# Altium PCB JBCBJ.pcbdoc
Units mil, origin at the board's own origin, x right, y up, seen from the top; angles counter-clockwise.
Board outline 4587.42 x 4393.21 mil, 2 copper layers (Top Layer, Bottom Layer); 95 components, 70 nets, 402 pads, 71 vias.
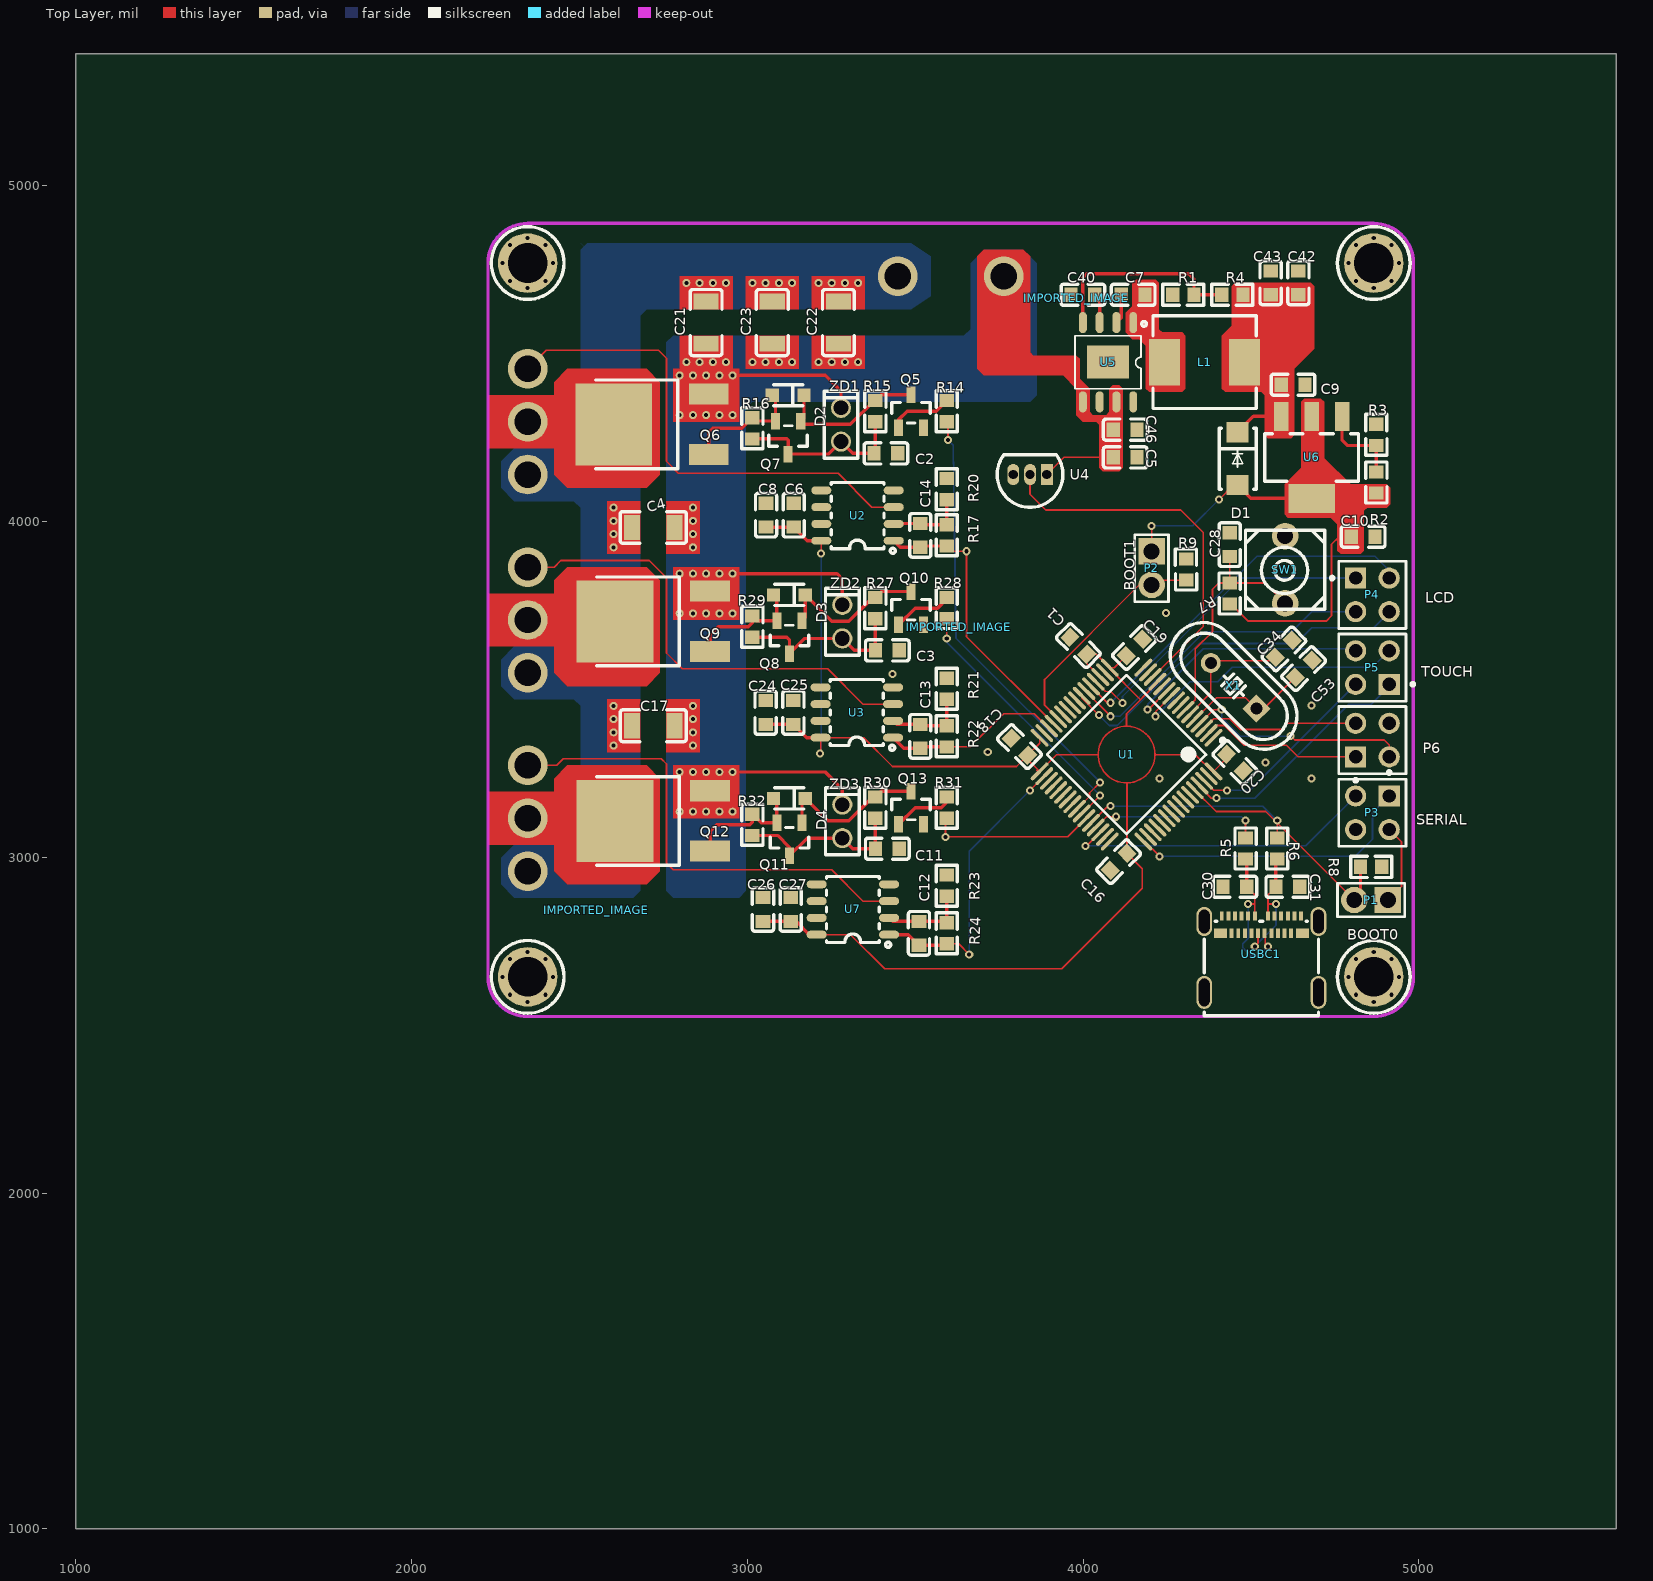
[diagram p0: Top Layer view]
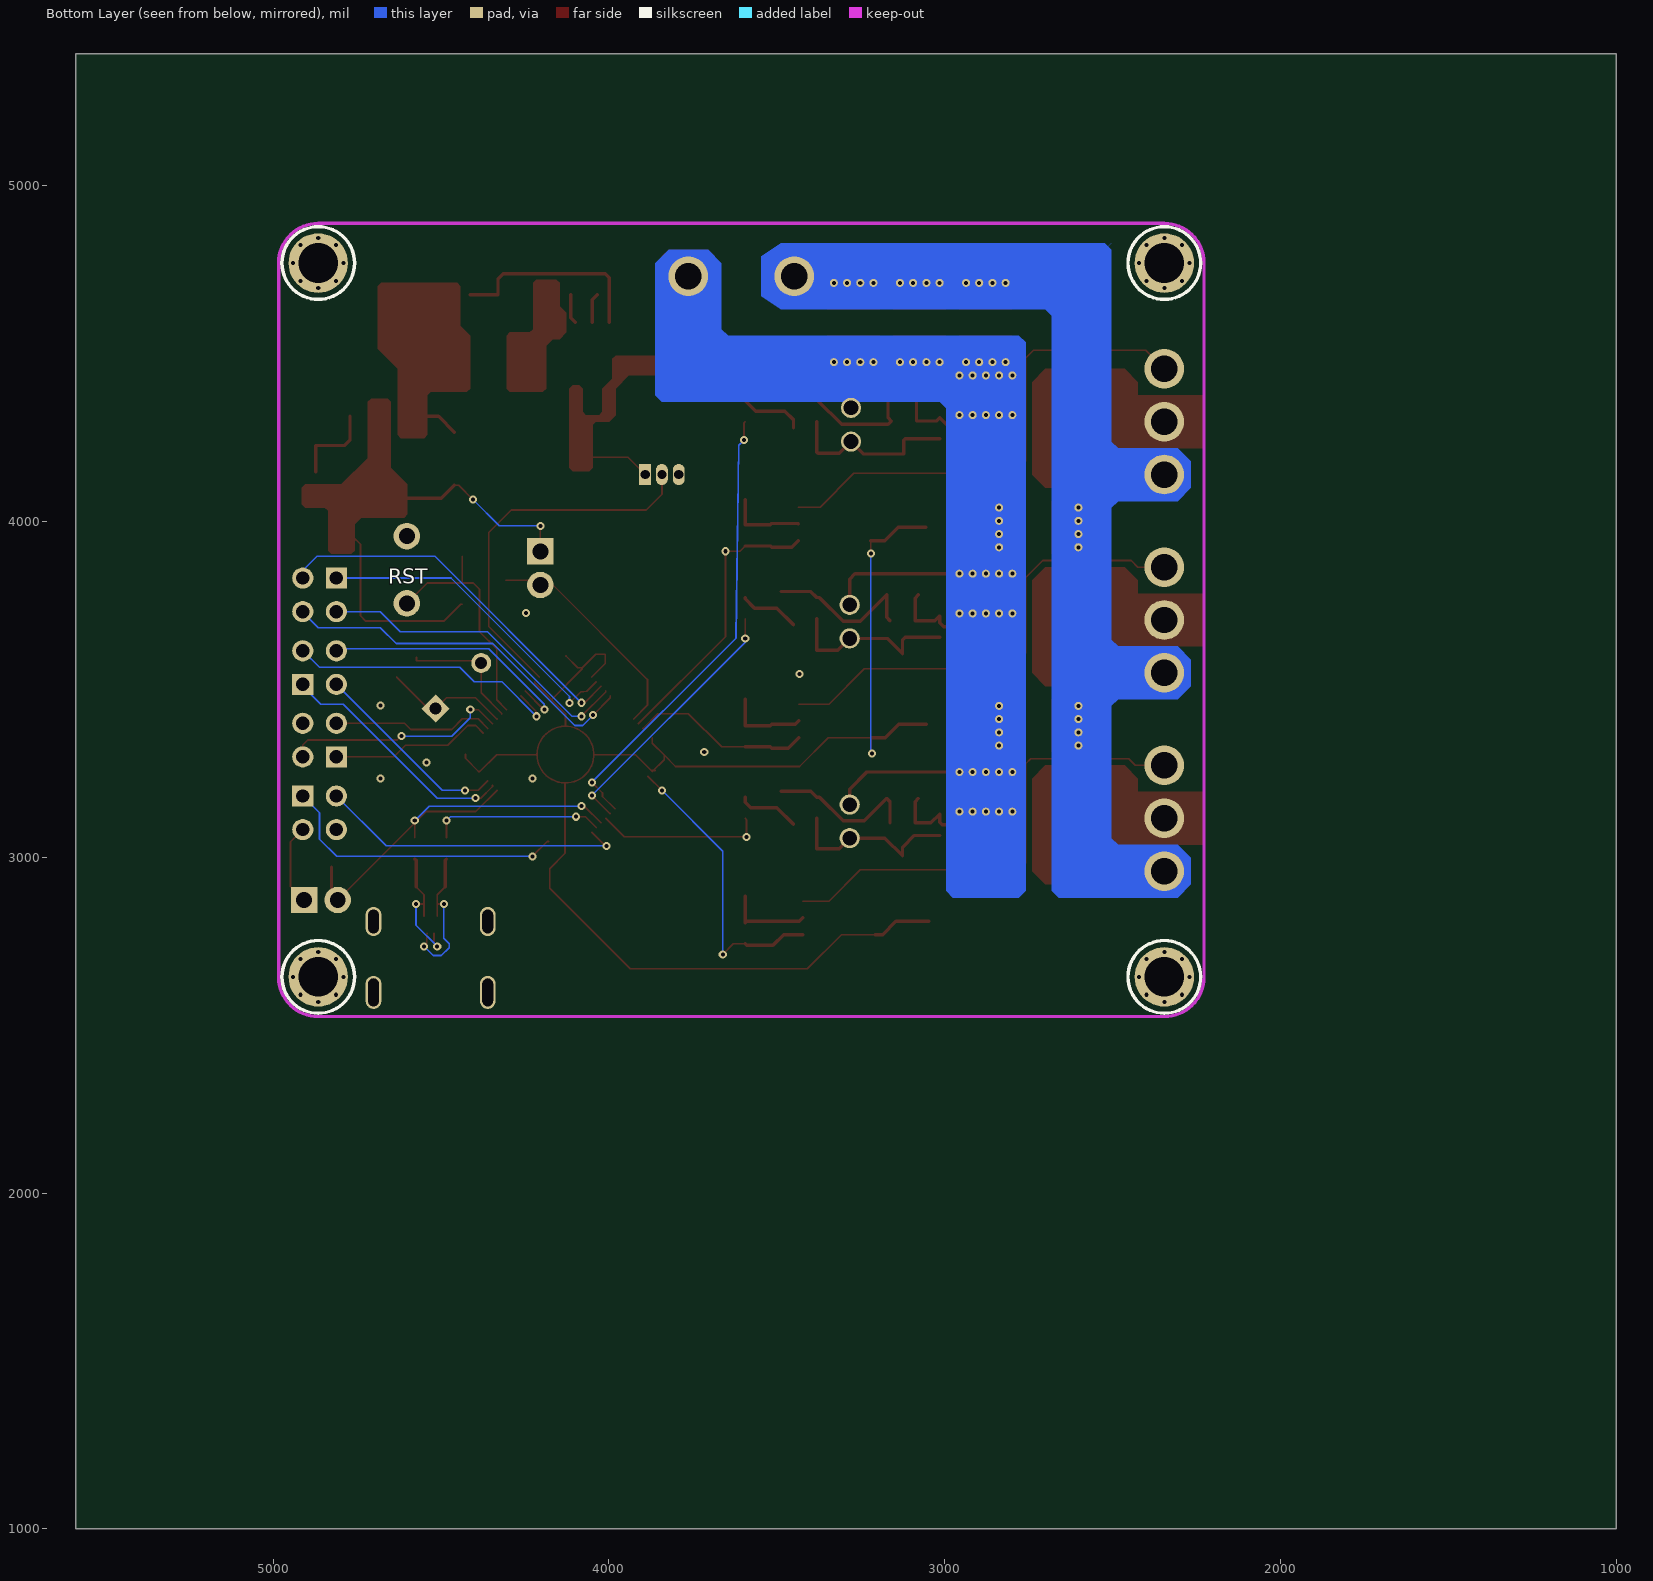
[diagram p1: Bottom Layer view, seen from below]

## Layer stack, top to bottom
Top Solder: solder mask 0.4, Solder Resist, Dk 3.5
Top Layer: signal copper 1.4
Dielectric1: dielectric 12.6, FR-4, Dk 4.8
Bottom Layer: signal copper 1.4
Bottom Solder: solder mask 0.4, Solder Resist, Dk 3.5

## Board outline
5587.42,1000 1000,1000 1000,5393.21 5587.42,5393.21

## Design rules (kind name [scope] priority, off if disabled: settings)
Clearance [All] p1: gap=10 ignorepadtopadclearanceinfootprint=FALSE except(0: Arc-Hole Track-Hole SMDPad-Hole THPad-Hole Via-Hole Fill-Hole Poly-Hole Region-Hole Text-Hole)
PolygonConnect [All] p1: connectstyle=Relief reliefconductorwidth=10 reliefentries=4 polygonreliefangle="90 Angle" airgapwidth=10
RoutingVias [All] p1: holewidth=28 width=50 viastyle="Through Hole" minholewidth=28 minwidth=50 maxholewidth=28 maxwidth=50
SolderMaskExpansion [All] p1: expansion=4 istentingtop=FALSE
Width [All] p1: maxlimit=10 minlimit=10 preferedwidth=10
30 further rules are at their usual default settings.

## Components (designator, comment, footprint, x,y, rotation, side; value= is the part's Value field where it differs from the comment)
C1 "100nF" C0603 3985.77,3630.58 r135 top
C2 "1uF" C0603 3412.67,4203.17 r180 top
C3 "1uF" C0603 3416.61,3616.56 r180 top
C4 "47uF" C1206 2719.76,3982.7 r0 top
C5 "100nF" C0603 4125.27,4191.36 r0 top
C6 "100nF" C0603 3138.16,4019.22 r90 top
C7 "100nF" C0603 4148.89,4675.61 r180 top
C8 "1uF" C0603 3055.48,4019.22 r90 top
C9 "100nF" C0603 4625.27,4407.9 r180 top
C10 "1uF" C0603 4833.93,3955.14 r180 top
C11 "1uF" C0603 3416.61,3026.01 r180 top
C12 "47pF" C0603 3511.09,2774.04 r270 top
C13 "47pF" C0603 3515.03,3360.66 r270 top
C14 "47pF" C0603 3515.03,3959.08 r270 top
C16 "100nF" C0603 4105.59,2987.28 r225 top
C17 "47uF" C1206 2719.76,3392.15 r0 top
C18 "100nF" C0603 3810.32,3329.8 r135 top
C19 "100nF" C0603 4152.84,3625.08 r45 top
C20 "100nF" C0603 4452.05,3282.56 r315 top
C21 "47uF" C1206 2877.24,4592.94 r270 top
C22 "47uF" C1206 3270.94,4592.94 r270 top
C23 "47uF" C1206 3074.09,4592.94 r270 top
C24 "1uF" C0603 3054.4,3431.52 r90 top
C25 "100nF" C0603 3137.08,3431.52 r90 top
C26 "1uF" C0603 3046.53,2844.91 r90 top
C27 "100nF" C0603 3129.2,2844.91 r90 top
C28 "100nF" C0603 4436.3,3931.52 r270 top
C30 "47pF" C0603 4452.05,2912.48 r0 top
C31 "47pF" C0603 4609.53,2912.48 r180 top
C34 "22pF" C0603 4597.72,3621.14 r45 top
C40 "2.2uF" C0603 3999.29,4675.61 r0 top
C42 "4.7uF" C0603 4641.02,4711.05 r90 top
C43 "100nF" C0603 4558.34,4711.05 r90 top
C46 "10uF" C0603 4125.27,4274.04 r0 top
C53 "22pF" C0603 4656.77,3562.08 r225 top
D1 "1N4007" DO-214BA_L4.8-W2.9-LS5.3-RD 4459.92,4187.42 r270 top
D2 "1N4148W" SOD-323F_L2.0-W1.6-LS2.5-RD 3121.33,4376.4 r180 top
D3 "1N4148W" SOD-323F_L2.0-W1.6-LS2.5-RD 3125.27,3781.91 r180 top
D4 "1N4148W" SOD-323F_L2.0-W1.6-LS2.5-RD 3125.27,3175.62 r180 top
IMPORTED_IMAGE "Comment" IMPORTED_IMAGE 3630,3685 r0 top
IMPORTED_IMAGE "Comment" IMPORTED_IMAGE 3980,4665 r0 top
IMPORTED_IMAGE "Comment" IMPORTED_IMAGE 2549.52,2843.13 r0 top
L1 "8.2uH" IND-SMD_L7.8-W7.0_MAPM0630F 4361.49,4474.82 r180 top
P1 "BOOT0" HDR-TH_2P-P2.54-V-M 4857.53,2873.11 r180 top
P2 "BOOT1" HDR-TH_2P-P2.54-V-M 4204.03,3861.31 r270 top
P3 "SERIAL" HDR-TH_4PIN-V-ROW2-COL2-MALE-PITCH2.54 4861.53,3132.91 r270 top
P4 "LCD" HDR-TH_4PIN-V-ROW2-COL2-MALE-PITCH2.54 4861.53,3781.91 r0 top
P5 "TOUCH" HDR-TH_4PIN-V-ROW2-COL2-MALE-PITCH2.54 4861.53,3565.41 r180 top
P6 "EXTI" HDR-TH_4PIN-V-ROW2-COL2-MALE-PITCH2.54 4861.53,3349.51 r90 top
Q5 "2N2222" SOT-23-3_L2.9-W1.3-P1.90-LS2.4-BR 3487.47,4329.16 r270 top
Q6 "IRF5305PBF" DPAK-3_L6.6-W6.1-P2.28-LS9.9-BR 2743.38,4289.79 r0 top
Q7 "2N2222" SOT-23-3_L2.9-W1.3-P1.90-LS2.4-BR 3121.33,4250.42 r90 top
Q8 "2N2222" SOT-23-3_L2.9-W1.3-P1.90-LS2.4-BR 3125.27,3655.93 r90 top
Q9 "IRF5305PBF" DPAK-3_L6.6-W6.1-P2.28-LS9.9-BR 2747.32,3703.17 r0 top
Q10 "2N2222" SOT-23-3_L2.9-W1.3-P1.90-LS2.4-BR 3487.47,3742.54 r270 top
Q11 "2N2222" SOT-23-3_L2.9-W1.3-P1.90-LS2.4-BR 3125.27,3053.57 r90 top
Q12 "IRF5305PBF" DPAK-3_L6.6-W6.1-P2.28-LS9.9-BR 2747.32,3108.69 r0 top
Q13 "2N2222" SOT-23-3_L2.9-W1.3-P1.90-LS2.4-BR 3487.47,3148.06 r270 top
R1 "33K" R0603 4298.5,4675.61 r0 top
R2 "68K" R0603 4873.3,4116.56 r270 top
R3 "30K" R0603 4873.3,4258.29 r90 top
R4 "100K" R0603 4444.17,4675.61 r0 top
R5 "22" R0603 4483.55,3026.65 r270 top
R6 "22" R0603 4578.03,3026.65 r270 top
R7 "15K" R0603 4436.3,3785.85 r90 top
R8 "15K" R0603 4857.56,2971.53 r0 top
R9 "15K" R0603 4306.38,3857.36 r90 top
R14 "2K2" R0603 3593.77,4329.16 r90 top
R15 "2K2" R0603 3381.17,4329.16 r270 top
R16 "10K" R0603 3015.03,4277.98 r90 top
R17 "270K" R0603 3593.78,3959.08 r90 top
R20 "1K" R0603 3593.78,4096.88 r270 top
R21 "1K" R0603 3593.77,3502.39 r270 top
R22 "270K" R0603 3593.77,3360.66 r90 top
R23 "1K" R0603 3593.77,2915.77 r270 top
R24 "270K" R0603 3593.77,2774.04 r90 top
R27 "2K2" R0603 3381.17,3742.54 r270 top
R28 "2K2" R0603 3593.77,3742.54 r90 top
R29 "10K" R0603 3015.03,3687.42 r90 top
R30 "2K2" R0603 3381.17,3148.06 r270 top
R31 "2K2" R0603 3593.77,3148.06 r90 top
R32 "10K" R0603 3015.03,3096.87 r90 top
SW1 "RST" KEY-6.0*6.0-4 4601.63,3856.71 r90 top
U1 "STM32F373RCT6" LQFP-64_L10.0-W10.0-P0.50-LS12.0-TL 4129.21,3306.18 r225 top
U2 "OPA2188AIDR" SOIC-8_L4.9-W3.9-P1.27-LS6.0-BL 3328.01,4018.14 r90 top
U3 "OPA2188AIDR" SOIC-8_L4.9-W3.9-P1.27-LS6.0-BL 3326.05,3431.52 r90 top
U4 "LM35DZ" TO-92-3_L4.9-W3.7-P1.27-L 3841.8,4140.18 r180 top
U5 "LMR23630ADDAR" SO-8_L4.9-W3.9-P1.27-LS6.0-BL-EP 4074.09,4474.82 r180 top
U6 "LM317_C84244" SOT-223-3_L6.5-W3.4-P2.30-LS7.0-BR 4680.39,4191.36 r90 top
U7 "OPA2188AIDR" SOIC-8_L4.9-W3.9-P1.27-LS6.0-BL 3314.24,2844.91 r90 top
USBC1 "105450-0101" USB-C-SMD_TYPE-C-USB-18 4530.79,2711.69 r0 top
X1 "8MHz" HC-49US_L11.5-W4.5-P4.88 4448.11,3510.9 r135 top
ZD1 "5V" "VERTICAL DO41 DIODE" 3278.81,4238.61 r90 top
ZD2 "5V" "VERTICAL DO41 DIODE" 3282.75,3651.99 r90 top
ZD3 "5V" "VERTICAL DO41 DIODE" 3282.75,3057.51 r90 top

## Footprints (in the part's own frame and the unit in brackets; to place one, negate y for a bottom-side part, rotate by r counter-clockwise, add the part's x,y. Pads: shape width x height; smd on the part's side, far side on the other; paste and mask are expansions set on the pad)
C0603 [mm]
  rect 1x1.1 smd: 1(-0.9,0) 2(0.9,0)
  silkscreen extent -1.65,-0.8 1.65,0.8
C1206 [mm]
  rect 1.2x1.9 smd: 1(-1.6,0) 2(1.6,0)
  silkscreen extent -2.5,-1.2 2.5,1.2
DO-214BA_L4.8-W2.9-LS5.3-RD [mm]
  rect 1.52x1.68 smd: 1(-2,0) 2(2,0)
  silkscreen extent -2.3,-1.4 2.3,1.4
DPAK-3_L6.6-W6.1-P2.28-LS9.9-BR [mil]
  rect 118.1x63 smd: 1(141.51,-90) 3(141.51,90)
  rect 228.25x244.15 smd: 2(-141.51,0.03)
  silkscreen extent -196,-132 49,132
HC-49US_L11.5-W4.5-P4.88 [mm]
  rect 1.5x1.5 hole 0.9: 1(-2.438,0)
  round 1.5 hole 0.9: 2(2.438,0)
  silkscreen extent -5.74,-2.5 5.74,2.5
HDR-TH_2P-P2.54-V-M [mm]
  rect 2x2 hole 1.2: 1(-1.27,0)
  round 2 hole 1.2: 2(1.27,0)
  silkscreen extent -2.54,-1.27 2.54,1.27
HDR-TH_4PIN-V-ROW2-COL2-MALE-PITCH2.54 [mm]
  rect 1.6x1.6 hole 1: 1(-1.27,1.27)
  round 1.6 hole 1: 2(1.27,1.27) 3(-1.27,-1.27) 4(1.27,-1.27)
  silkscreen extent -3.17,-2.54 2.54,2.54
IMPORTED_IMAGE [mil]
IND-SMD_L7.8-W7.0_MAPM0630F [mm]
  rect 2.35x3.5 smd: 1(-3.025,0) 2(3.025,0)
  silkscreen extent -3.9,-3.5 3.9,3.5
KEY-6.0*6.0-4 [mm]
  round 2 hole 1.2: 1(2.54,0) 2(-2.54,0)
  silkscreen extent -3,-3 3,3
LQFP-64_L10.0-W10.0-P0.50-LS12.0-TL [mil]
  oval 70.7x11.02 smd: 1(-218.5,147.64) 2(-218.5,127.95) 3(-218.5,108.27) 4(-218.5,88.58) 5(-218.5,68.9) 6(-218.5,49.21) 7(-218.5,29.53) 8(-218.5,9.84) 9(-218.5,-9.84) 10(-218.5,-29.53) 11(-218.5,-49.21) 12(-218.5,-68.9) 13(-218.5,-88.58) 14(-218.5,-108.27) 15(-218.5,-127.95) 16(-218.5,-147.64) 33(218.5,-147.64) 34(218.5,-127.95) 35(218.5,-108.27) 36(218.5,-88.58) 37(218.5,-68.9) 38(218.5,-49.21) 39(218.5,-29.53) 40(218.5,-9.84) 41(218.5,9.84) 42(218.5,29.53) 43(218.5,49.21) 44(218.5,68.9) 45(218.5,88.58) 46(218.5,108.27) 47(218.5,127.95) 48(218.5,147.64)
  oval 11.02x70.7 smd: 17(-147.64,-218.5) 18(-127.95,-218.5) 19(-108.27,-218.5) 20(-88.58,-218.5) 21(-68.9,-218.5) 22(-49.21,-218.5) 23(-29.53,-218.5) 24(-9.84,-218.5) 25(9.84,-218.5) 26(29.53,-218.5) 27(49.21,-218.5) 28(68.9,-218.5) 29(88.58,-218.5) 30(108.27,-218.5) 31(127.95,-218.5) 32(147.64,-218.5) 49(147.64,218.5) 50(127.95,218.5) 51(108.27,218.5) 52(88.58,218.5) 53(68.9,218.5) 54(49.21,218.5) 55(29.53,218.5) 56(9.84,218.5) 57(-9.84,218.5) 58(-29.53,218.5) 59(-49.21,218.5) 60(-68.9,218.5) 61(-88.58,218.5) 62(-108.27,218.5) 63(-127.95,218.5) 64(-147.64,218.5)
  silkscreen extent -238,-167 167,179
R0603 [mm]
  rect 1x1.1 smd: 1(-0.8,0) 2(0.8,0)
  silkscreen extent -1.55,-0.8 1.55,0.81
SO-8_L4.9-W3.9-P1.27-LS6.0-BL-EP [mm]
  oval 0.6x1.598 smd: 1(-1.905,-3) 2(-0.635,-3) 3(0.635,-3) 4(1.905,-3) 5(1.905,3) 6(0.635,3) 7(-0.635,3) 8(-1.905,3)
  rect 3.2x2.5 smd: 9(0,0)
  silkscreen extent -2.9,-3.07 2.5,2
SOD-323F_L2.0-W1.6-LS2.5-RD [mm]
  rect 1x1 smd: 1(-1.2,0) 2(1.2,0)
  silkscreen extent -1.1,-0.8 1.1,0.8
SOIC-8_L4.9-W3.9-P1.27-LS6.0-BL [mm]
  oval 0.6x1.518 smd: 1(-1.905,-2.74) 2(-0.635,-2.74) 3(0.635,-2.74) 4(1.905,-2.74) 5(1.905,2.74) 6(0.635,2.74) 7(-0.635,2.74) 8(-1.905,2.74)
  silkscreen extent -2.86,-2.86 2.5,2
SOT-23-3_L2.9-W1.3-P1.90-LS2.4-BR [mm]
  rect 1.25x0.7 smd: 1(1.25,-0.95) 2(1.25,0.95) 3(-1.25,0)
  silkscreen extent -0.65,-1.46 0.9,1.46
SOT-223-3_L6.5-W3.4-P2.30-LS7.0-BR [mm]
  rect 2.2x1.1 smd: 1(3.099,-2.3) 2(3.099,0) 3(3.099,2.3)
  rect 2.2x3.5 smd: 4(-3.099,0)
  silkscreen extent -1.8,-3.55 1.8,3.55
TO-92-3_L4.9-W3.7-P1.27-L [mm]
  rect 0.9x1.6 hole 0.7: 1(-1.27,0)
  oval 0.9x1.6 hole 0.7: 2(0,0) 3(1.27,0)
  silkscreen extent -2.48,-1.5 2.48,2.48
USB-C-SMD_TYPE-C-USB-18 [mm]
  oval 1.2x2.5 hole 0.8 slot 2.1 at 90 deg copper offset 0,0: 0(-4.32,-2.885) 0(4.32,-2.885)
  oval 1.2x2.2 hole 0.8 slot 1.8 at 90 deg copper offset 0,0: 0(-4.32,2.475) 0(4.32,2.475)
  rect 0.3x0.7 smd: A1(-2.998,2.885) A2(-2.498,2.885) A3(-1.998,2.885) A4(-1.496,2.885) A5(-0.996,2.885) A6(-0.5,2.885) A7(0.504,2.885) A8(1,2.885) A9(1.5,2.885) A10(2,2.885) A11(2.5,2.885) A12(3,2.885) B2(2.25,1.585) B3(1.75,1.585) B4(1.25,1.585) B5(0.75,1.585) B6(0.25,1.585) B7(-0.25,1.585) B8(-0.75,1.585) B9(-1.25,1.585) B10(-1.75,1.585) B11(-2.25,1.585)
  rect 1x0.7 smd: B1(3.1,1.585) B12(-3.1,1.585)
  silkscreen extent -4.32,-4.66 4.32,2.5
"VERTICAL DO41 DIODE" [mil]
  round 60 hole 43.31: 1(0,0) 2(100,0)
  silkscreen extent -50,-50 150,50

## Free pads (board coordinates)
  round 177.16 hole 118.11: 3(2345.71,4770.12) 3(2345.72,2644.09) 3(4865.44,4770.13) 3(4865.45,2644.1)
  round 118.11 hole 78.74: 4(2345.74,4297.66) 5(2345.74,3707.11) 6(2345.74,3116.56) 8(3448.1,4730.73) 9(3763.07,4730.73) 10(2345.74,4455.14) 11(2345.74,4140.18) 12(2345.74,3864.59) 13(2345.74,3549.63) 14(2345.74,2959.08) 15(2345.74,3274.04)
  round 24 hole 12: ""(2601.65,3333.09) ""(2601.65,3372.46) ""(2601.65,3411.83) ""(2601.65,3451.2) ""(2601.65,3923.64) ""(2601.65,3963.01) ""(2601.65,4002.38) ""(2601.65,4041.75) ""(2798.5,3136.24) ""(2798.5,3254.35) ""(2798.5,3726.79) ""(2798.5,3844.9) ""(2798.5,4317.35) ""(2798.5,4435.45) ""(2818.18,4474.82) ""(2818.18,4711.05) ""(2837.87,3136.24) ""(2837.87,3254.35) ""(2837.87,3333.09) ""(2837.87,3372.46) ""(2837.87,3411.83) ""(2837.87,3451.2) ""(2837.87,3726.79) ""(2837.87,3844.9) ""(2837.87,3923.64) ""(2837.87,3963.01) ""(2837.87,4002.38) ""(2837.87,4041.75) ""(2837.87,4317.35) ""(2837.87,4435.45) ""(2857.55,4474.82) ""(2857.55,4711.05) ""(2877.24,3136.24) ""(2877.24,3254.35) ""(2877.24,3726.79) ""(2877.24,3844.9) ""(2877.24,4317.35) ""(2877.24,4435.45) ""(2896.92,4474.82) ""(2896.92,4711.05) ""(2916.61,3136.24) ""(2916.61,3254.35) ""(2916.61,3726.79) ""(2916.61,3844.9) ""(2916.61,4317.35) ""(2916.61,4435.45) ""(2936.29,4474.82) ""(2936.29,4711.05) ""(2955.98,3136.24) ""(2955.98,3254.35) ""(2955.98,3726.79) ""(2955.98,3844.9) ""(2955.98,4317.35) ""(2955.98,4435.45) ""(3015.03,4474.82) ""(3015.03,4711.05) ""(3054.4,4474.82) ""(3054.4,4711.05) ""(3093.77,4474.82) ""(3093.77,4711.05) ""(3133.14,4474.82) ""(3133.14,4711.05) ""(3211.88,4474.82) ""(3211.88,4711.05) ""(3251.25,4474.82) ""(3251.25,4711.05) ""(3290.62,4474.82) ""(3290.62,4711.05) ""(3329.99,4474.82) ""(3329.99,4711.05)

## Via types
v1: diameter 24, hole 12, Top Layer to Bottom Layer, 71 vias

## Nets (pads, with @x,y where several pads share a name; then routed paths per layer and width w, separated by ;. In a path a pad name is that pad's centre, name@x,y a point inside that pad or via, vN(x,y) a via of type N, cw(c..) or ccw(c..) an arc to the next point about the centre after c; other vN are vias at no path point)
3.3V: C1.1 C6.1 C8.1 C10.2 C16.1 C18.1 C19.1 C20.1 D1.2 P1.1 P2.1 R2.2 R7.1 U1.13 U1.17 U1.19 U1.32 U1.33 U1.64 U2.8 U3.8 U6.2 U6.4 U7.8 | length 4384.9
  Top Layer w5: U7.8 3307.22,2769.9 3408.74,2668.38 3936.3,2668.38 4176.46,2908.54 4176.46,2966.53 C16.1 4130.65,3220.64 4129.64,3221.65 ; 3861.53,3258.91 3873.33,3258.91 3920.53,3306.21 4044.73,3306.21 ; U1.19@4051.23,3537.21 4010.83,3577.71 C1.1 4038.63,3605.51 U1.17 ; C19.1 4092.85,3565.09 U1.17 4079.1,3561.57 4170.83,3469.84 ; 4129.21,3390.71 4129.21,3428.23 4221.07,3520.08 U1.13 ; P2.1 v1(4204.02,3987.28) ; v1(4404.8,4066.02) 4447.43,4108.71 D1.2 ; C20.1 4426.99,3294.96 U1.64 4384.04,3256.08 4333.94,3306.18 4213.74,3306.18 ; R7.1 4440.88,3754.35 4491.42,3703.82 4723.7,3703.82 4739.45,3719.57 4739.45,3932.16 4762.43,3955.14 C10.2 ; 4213.74,3306.18 ccw(c4129.21,3306.18) 4213.74,3306.18
  Top Layer w10: 3046.53,2809.47 3129.2,2809.47 ; 3129.2,2809.51 3145.01,2809.51 3184.5,2769.91 U7.8 ; D1.2 4499.24,4069.36 U6.4
  Bottom Layer w5: v1(4204.02,3987.28) 4326.06,3987.28 v1(4404.8,4066.02)
BATT: U1.1 U1.15
D1_1: C9.2 C42.1 C43.1 D1.1 L1.1 R4.2 U6.3 | length 149.5
  Top Layer w10: D1.1 4507.11,4313.36 U6.3
D3_2: D3.2 Q8.2 Q9.1 R29.2 | length 370.4
  Top Layer w10: Q9.1 2889.03,3663.81 2912.63,3687.41 3003.23,3687.41 3015.03,3699.21 R29.2 ; R29.2 3028.83,3705.13 Q8.2 3087.87,3772.06 D3.2
D4_2: D4.2 Q11.2 Q12.1 R32.2 | length 379.9
  Top Layer w10: Q12.1 2889.03,3077.21 2908.73,3096.91 3007.13,3096.91 3015.03,3104.71 R32.2 3040.67,3102.77 Q11.2 3087.87,3165.76 D4.2
EXTI0: P6.1 U1.2 | length 485.4
  Top Layer w5: U1.2@4374.13,3370.21 4396.73,3392.81 4420.53,3392.81 4479.63,3333.71 4605.63,3333.71 4639.83,3299.51 P6.1
EXTI1: P6.2 U1.3 | length 483.7
  Top Layer w5: U1.3 4388.62,3412.48 4436.3,3412.48 4467.8,3380.98 4589.84,3380.98 4608.35,3399.49 P6.2
EXTI2: P6.3 U1.4 | length 674.8
  Top Layer w5: U1.4@4346.33,3398.01 4388.33,3440.01 v1@4412.63,3440.01 ; v1(4617.4,3361.3) 4630.77,3349.58 4896.93,3349.51 4911.53,3334.91 P6.3
  Bottom Layer w5: v1(4412.68,3440.04) 4412.68,3416.41 4467.8,3361.3 v1(4617.4,3361.3)
GND: C1.2 C2.1 C3.1 C4.1 C5.2 C6.2 C8.2 C9.1 C10.1 C11.1 C16.2 C17.1 C18.2 C19.2 C20.2 C21.1 C22.1 C23.1 C24.2 C25.2 C26.2 C27.2 C28.1 C30.1 C31.1 C34.2 C40.1 C42.2 C43.2 C46.2 C53.1 P1.2 P2.2 P3.2 P3.4 P6.4 pad.8 pad.11 pad.13 pad.14 pad.@2601.65,3333.09 pad.@2601.65,3372.46 pad.@2601.65,3411.83 pad.@2601.65,3451.2 pad.@2601.65,3923.64 pad.@2601.65,3963.01 pad.@2601.65,4002.38 pad.@2601.65,4041.75 pad.@2818.18,4711.05 pad.@2857.55,4711.05 pad.@2896.92,4711.05 pad.@2936.29,4711.05 pad.@3015.03,4711.05 pad.@3054.4,4711.05 pad.@3093.77,4711.05 pad.@3133.14,4711.05 pad.@3211.88,4711.05 pad.@3251.25,4711.05 pad.@3290.62,4711.05 pad.@3329.99,4711.05 Q5.2 Q10.2 Q13.2 R1.1 R3.2 R8.1 R8.2 R9.1 R9.2 R20.1 R21.1 R23.1 SW1.1 U1.12 U1.28 U1.31 U1.60 U1.63 U2.4 U3.4 U4.3 U5.6 U5.8 U5.9 U7.4 USBC1.0 USBC1.A1 USBC1.A12 USBC1.B1 USBC1.B12 | length 1637.3
  Top Layer w5: U1.28@3925.93,3412.01 3885.13,3452.81 3885.13,3529.91 4166.53,3811.31 P2.2 ; P2.2 4218.57,3825.87 R9.1 ; U1.60 4395.96,3136.89 4543.78,3136.89 P1.2@4807.59,2873.08 ; 4907.53,2873.11 4948.13,2913.61 4948.13,3046.31 P3.2
  Top Layer w10: P1.2@4807.58,2873.09 4826.06,2891.56 R8.1
  other v1: 4227.64,3235.31 4680.39,3235.31 4542.6,3282.56 3715.83,3314.05 4680.39,3451.85 3432.35,3545.69 4247.32,3727.44
JBC0: R14.1 U1.41 | length 1367.6
  Top Layer w5: R14.1 3597.71,4293.73 v1(3597.71,4242.54) ; U1.41 4018.78,3181.58 4018.78,3191.8 v1(4050.47,3223.5)
  Bottom Layer w5: v1(3597.71,4242.54) 3613.47,4227.44 3621.33,3652.61 v1@4050.43,3223.51
JBC0BLUE: pad.4
JBC1: R28.1 U1.42 | length 793.1
  Top Layer w5: v1(3593.77,3651.99) R28.1 ; U1.42 3997.14,3130.8 v1(4050.47,3184.13)
  Bottom Layer w5: v1(3593.77,3651.99) 3593.77,3640.83 v1(4050.47,3184.13)
JBC1BLUE: pad.5 Q9.2
JBC1RED: pad.12 U3.3 | length 1405.1
  Top Layer w5: pad.12 2424.53,3864.61 2444.13,3884.31 2707.93,3884.31 2759.13,3833.11 2759.13,3608.71 2806.33,3561.41 3239.41,3561.42 3344.32,3456.52 U3.3
JBCBLUE: Q6.2
JBCRED: pad.10 U2.3 | length 1486.7
  Top Layer w5: pad.10 2400.83,4510.21 2735.53,4510.21 2759.13,4486.61 2759.13,4179.51 2794.53,4144.11 3267,4144.12 ; 3267.03,4144.11 3271.13,4144.11 3370.83,4043.21 U2.3@3435.93,4043.21
JBCU: R31.1 U1.43 | length 499.4
  Top Layer w5: R31.1 3589.83,3112.62 v1(3589.83,3061.44) 3954.05,3061.44 U1.43
JBCUBLUE: pad.6 Q12.2
JBCURED: pad.15 U7.3 | length 1433
  Top Layer w5: pad.15 2432.36,3274.04 2452.04,3293.72 2743.38,3293.72 2759.13,3277.97 2759.13,2982.7 2778.81,2963.01 3251.25,2963.02 3344.36,2869.91 U7.3
MIN1: C14.1 R17.2 R20.2 U2.2 | length 234.9
  Top Layer w10: U2.2 3437.26,3994.51 C14.1 3518.97,3990.57 R17.2 R20.2
MIN2: C13.1 R21.2 R22.2 U3.2 | length 244.5
  Top Layer w10: U3.2 3444.36,3396.09 C13.1 3518.97,3392.15 3593.77,3392.15 R21.2
MIN3: C12.1 R23.2 R24.2 U7.2 | length 256.4
  Top Layer w10: U7.2 3432.54,2809.48 C12.1 3589.83,2809.48 R24.2 R23.2
OUT1: C14.2 R17.1 U1.29 U2.1 | length 854.3
  Top Layer w5: R17.1 3609.52,3911.84 v1(3652.82,3911.83) ; v1(3652.82,3911.83) 3652.82,3657.3 U1.29
  Top Layer w10: U2.1 3455.38,3923.64 C14.2 3518.98,3927.59 R17.1
OUT2: C13.2 R22.1 U1.30 U3.1 | length 538.1
  Top Layer w5: R22.1 3664.01,3329.16 3763.07,3428.23 3854.05,3428.23 U1.30@3898.15,3384.13
  Top Layer w10: U3.1 3465.23,3325.22 C13.2 3518.97,3329.16 R22.1
OUT3: C12.2 R24.1 U1.34 U7.1 | length 889.9
  Top Layer w5: R24.1 3629.2,2742.55 v1@3660.7,2711.05 ; v1(3841.81,3199.88) U1.34@3884.23,3242.11
  Top Layer w10: U7.1 3479.79,2769.91 C12.2 3589.83,2738.61 R24.1
  Bottom Layer w5: v1(3660.7,2711.05) 3660.7,3018.77 v1(3841.81,3199.88)
PA0: U1.14 U4.2 | length 1114.1
  Top Layer w5: U4.2 3841.83,4081.81 3889.03,4034.51 4290.63,4034.51 4357.53,3967.61 4357.53,3687.71 U1.14@4207.13,3537.21
PA4: P4.1 U1.20 | length 965.4
  Top Layer w5: U1.20 4065.77,3494.58 4083.77,3492.58 v1(4117.4,3459.72)
  Bottom Layer w5: v1(4117.4,3459.72) 4117.4,3479.38 4469.93,3831.91 P4.1
PA5: P4.2 U1.21 | length 1129.1
  Top Layer w5: U1.21 4072.25,3460.58 v1(4081.77,3460.58)
  Bottom Layer w5: v1(4081.77,3460.58) 4517.92,3896.73 4869.37,3896.73 4911.48,3854.62 P4.2
PA6: P4.3 U1.22 | length 963.7
  Top Layer w5: U1.22 4009.5,3492.83 v1(4081.97,3420.35)
  Bottom Layer w5: v1@4081.93,3420.31 4109.53,3420.31 4361.53,3672.31 4621.33,3672.31 4680.93,3731.91 P4.3@4811.43,3731.91
PA7: P4.4 U1.23 | length 1097.8
  Top Layer w5: U1.23 3995.59,3475.24 v1(4046.54,3424.29)
  Bottom Layer w5: v1(4046.54,3424.29) 4078.03,3392.81 4101.63,3392.81 4345.73,3636.91 4633.13,3636.91 4680.43,3684.11 4865.43,3684.11 4911.43,3730.21 P4.4@4911.43,3731.91
PA13: P3.3 U1.46 | length 926.7
  Top Layer w5: v1@4007.13,3034.51 4010.63,3034.51 U1.46@4051.23,3075.11
  Bottom Layer w5: v1(4007.17,3034.52) 4663.07,3034.52 P3.3@4811.5,3182.95
PA14: P3.1 U1.49 | length 871.2
  Top Layer w5: U1.49 4183.38,3047.29 v1(4227.64,3003.03)
  Bottom Layer w5: v1(4227.64,3003.03) 4810.32,3003.03 4861.5,3054.21 4861.5,3132.95 P3.1
PB8: P5.1 U1.61 | length 726.6
  Top Layer w5: U1.61@4346.35,3214.32 4346.35,3211.09 4381.18,3176.26 4397.45,3176.26 v1(4397.77,3176.58)
  Bottom Layer w5: v1(4397.77,3176.58) 4511.43,3176.58 4790.63,3455.78 4857.56,3455.78 4911.49,3509.72 P5.1
PB9: P5.2 U1.62 | length 593.5
  Top Layer w5: U1.62@4360.23,3228.21 4389.03,3199.91 v1(4428.43,3199.88)
  Bottom Layer w5: v1(4428.43,3199.88) 4496.01,3199.88 P5.2
PC2: P5.3 U1.10 | length 857
  Top Layer w5: v1(4215.83,3420.35) 4215.83,3434.61 U1.10
  Bottom Layer w5: v1(4215.83,3420.35) 4318.19,3522.71 4400.87,3522.71 4444.18,3566.02 4861.5,3566.02 P5.3
PC3: P5.4 U1.11 | length 789
  Top Layer w5: v1(4192.2,3440.04) 4193.46,3440.04 U1.11
  Bottom Layer w5: v1(4192.2,3440.04) 4192.2,3455.78 4357.56,3621.14 4811.5,3621.14 P5.4
PF0: C53.2 U1.5 X1.1 | length 378
  Top Layer w5: U1.5 4333.43,3412.01 4396.93,3475.51 4483.53,3475.51 X1.1 ; X1.1 4537.72,3443.02 C53.2
PF1: C34.1 U1.6 X1.2 | length 384.1
  Top Layer w5: U1.6 4318.53,3428.51 4380.23,3490.21 X1.2 4387.13,3585.71 4572.63,3585.71 C34.1@4572.63,3596.11
Q5_1: Q5.1 R14.2 | length 190.9
  Top Layer w10: Q5.1 3450.07,4303.56 3475.66,4329.16 3562.28,4329.16 R14.2
Q5_3: D2.1 Q5.3 Q7.1 R15.1 | length 450.4
  Top Layer w10: D2.1 3168.57,4309.46 Q7.1 3168.57,4289.78 3306.37,4289.78 3377.24,4360.65 3381.17,4360.65 3398.88,4378.36 Q5.3
R2_1: R2.1 R3.1 U6.1 | length 258.4
  Top Layer w10: U6.1 4770.94,4242.54 4786.69,4226.79 R3.1 R2.1@4873.3,4148.05
R5_1: R5.1 U1.45 | length 515.6
  Top Layer w5: U1.45@4037.34,3089.05 4069.43,3121.14 v1(4097.72,3121.14) ; R5.1 v1(4483.54,3109.33)
  Bottom Layer w5: v1(4097.72,3121.14) 4471.73,3121.14 v1(4483.54,3109.33)
R6_1: R6.1 U1.44 | length 644.3
  Top Layer w5: U1.44@4023.43,3102.91 4073.15,3152.63 v1(4081.97,3152.63) ; R6.1 v1(4578.03,3109.33)
  Bottom Layer w5: v1(4081.97,3152.63) 4534.71,3152.63 v1(4578.03,3109.33)
R16_1: C2.2 Q7.3 R15.2 R16.1 ZD1.1 | length 531.4
  Top Layer w10: R16.1 3117.4,4246.48 3121.33,4242.54 Q7.3 3241.42,4201.22 ZD1.1 3314.23,4203.17 C2.2 3381.17,4207.11 R15.2
R16_2: D2.2 Q6.1 Q7.2 R16.2 | length 368.2
  Top Layer w10: Q6.1 2884.89,4265.94 2896.92,4277.98 2983.54,4277.98 R16.2 3024.88,4299.62 Q7.2 3083.93,4366.55 D2.2
R27_1: D3.1 Q8.1 Q10.3 R27.1 | length 465
  Top Layer w10: Q8.1 3172.51,3714.97 D3.1 ; D3.1 3251.23,3703.21 3301.83,3703.21 3372.63,3774.01 R27.1@3381.13,3774.01 ; R27.1 3398.87,3791.74 Q10.3
R27_2: C3.2 Q8.3 R27.2 R29.1 ZD2.1 | length 538.6
  Top Layer w10: R29.1 3117.4,3655.93 3125.27,3648.05 Q8.3 3170.52,3651.98 3282.75,3651.98 3318.17,3616.56 C3.2 R27.2
R28_2: Q10.1 R28.2 | length 179.4
  Top Layer w10: Q10.1 3499.27,3742.54 3566.22,3742.54 3593.77,3770.1 R28.2
R30_1: D4.1 Q11.1 Q13.3 R30.1 | length 456.2
  Top Layer w10: Q11.1 3162.67,3165.77 D4.1 ; D4.1 3239.43,3108.71 3301.83,3108.71 3372.63,3179.51 R30.1@3381.13,3179.51 ; R30.1 3398.88,3197.26 Q13.3
R30_2: C11.2 Q11.3 R30.2 R32.1 ZD3.1 | length 532
  Top Layer w10: R32.1 3089.84,3065.38 3125.27,3029.94 Q11.3 3178.41,3057.51 ZD3.1 3314.24,3026.01 C11.2 R30.2
R31_2: Q13.1 R31.2 | length 186.4
  Top Layer w10: Q13.1 3499.26,3148.05 3578.03,3148.05 3593.77,3163.8 R31.2
RST: C28.2 R7.2 SW1.2 U1.7 | length 720.1
  Top Layer w5: U1.7 4333.93,3469.11 4333.93,3621.11 4385.13,3672.31 4385.13,3798.31 4404.13,3817.31 R7.2 ; C28.2 R7.2 4541.04,3817.34 SW1.2@4601.66,3756.72
S$15: 
S$17: 
S$56: 
S$71: 
S$181: 
S$3279: 
S$3285: 
S$3287: 
S$3289: 
S$3291: 
S$3293: 
U5_1: C7.1 L1.2 U5.1
U5_2: C7.2 U5.2 | length 88.6
  Top Layer w10: U5.2 4113.45,4607.29 C7.2@4113.45,4675.61
U5_3: C40.2 U5.3 | length 88.6
  Top Layer w10: C40.2 4049.09,4661.24 U5.3
U5_4: R1.2 R4.1 U5.4 | length 606
  Top Layer w10: U5.4 3999.09,4726.6 4011.1,4738.6 4314.25,4738.6 4329.99,4722.86 R1.2 R4.1
USBDM: C31.2 R6.2 USBC1.A7 USBC1.B7 | length 399.7
  Top Layer w5: v1(4511.1,2735.31) 4520.95,2745.16 USBC1.B7 ; USBC1.A7 4550.64,2889.02 C31.2 ; 4550.63,2861.31 v1(4574.09,2861.3)
  Top Layer w10: C31.2 4574.09,2991.21 R6.2@4578.04,2995.15
  Bottom Layer w5: v1(4511.1,2735.31) 4574.1,2798.3 v1(4574.09,2861.3)
USBDP: C30.2 R5.2 USBC1.A6 USBC1.B6 | length 480.9
  Top Layer w5: C30.2 4511.11,2888.85 USBC1.A6 ; v1(4491.42,2861.3) 4511.13,2861.31 ; USBC1.B6 4542.63,2772.11 4542.63,2735.31 v1@4550.43,2735.31
  Top Layer w10: R5.2@4483.54,2995.15 4487.48,2991.21 C30.2
  Bottom Layer w5: v1(4491.42,2861.3) 4491.42,2758.93 4475.67,2743.19 4475.67,2731.38 4499.29,2707.75 4522.91,2707.75 v1(4550.47,2735.31)
VCC: C4.2 C5.1 C17.2 C21.2 C22.2 C23.2 C24.1 C25.1 C26.1 C27.1 C46.1 pad.9 pad.@2798.5,3136.24 pad.@2798.5,3254.35 pad.@2798.5,3726.79 pad.@2798.5,3844.9 pad.@2798.5,4317.35 pad.@2798.5,4435.45 pad.@2818.18,4474.82 pad.@2837.87,3136.24 pad.@2837.87,3254.35 pad.@2837.87,3333.09 pad.@2837.87,3372.46 pad.@2837.87,3411.83 pad.@2837.87,3451.2 pad.@2837.87,3726.79 pad.@2837.87,3844.9 pad.@2837.87,3923.64 pad.@2837.87,3963.01 pad.@2837.87,4002.38 pad.@2837.87,4041.75 pad.@2837.87,4317.35 pad.@2837.87,4435.45 pad.@2857.55,4474.82 pad.@2877.24,3136.24 pad.@2877.24,3254.35 pad.@2877.24,3726.79 pad.@2877.24,3844.9 pad.@2877.24,4317.35 pad.@2877.24,4435.45 pad.@2896.92,4474.82 pad.@2916.61,3136.24 pad.@2916.61,3254.35 pad.@2916.61,3726.79 pad.@2916.61,3844.9 pad.@2916.61,4317.35 pad.@2916.61,4435.45 pad.@2936.29,4474.82 pad.@2955.98,3136.24 pad.@2955.98,3254.35 pad.@2955.98,3726.79 pad.@2955.98,3844.9 pad.@2955.98,4317.35 pad.@2955.98,4435.45 pad.@3015.03,4474.82 pad.@3054.4,4474.82 pad.@3093.77,4474.82 pad.@3133.14,4474.82 pad.@3211.88,4474.82 pad.@3251.25,4474.82 pad.@3290.62,4474.82 pad.@3329.99,4474.82 Q6.3 Q9.3 Q12.3 U4.1 U5.5 U5.7 ZD1.2 ZD2.2 ZD3.2 | length 3255
  Top Layer w5: v1(3215.83,3310.11) 3218.18,3312.47 3218.18,3356.52 3346.59,3356.52 3432.36,3270.75 3801.37,3270.75 3835.37,3304.75 ; v1@3219.73,3904.61 3220.13,3943.11 ; 3870.31,3256.08 3835.37,3291.02 3835.37,3304.75 ; 3870.31,3356.29 3870.31,3339.69 3835.37,3304.75 ; U4.1 3942.98,4191.36 C5.1
  Top Layer w10: pad.@2955.93,3844.91 3267.03,3844.91 3282.73,3829.11 ZD2.2 ; pad.@2955.98,3254.35 3231.57,3254.35 3282.74,3203.18 ZD3.2 ; pad.@2955.98,4435.45 3231.57,4435.45 3278.8,4388.22 ZD1.2 ; C24.1 C25.1 3176.64,3356.52 3218.18,3356.52 ; 3055.48,3983.79 3138.16,3983.79 3178.81,3943.14 3220.14,3943.14
  Bottom Layer w5: v1(3215.83,3310.11) 3219.76,3314.05 v1(3219.76,3904.6)
pads on no net: U1.8 U1.9 U1.16 U1.18 U1.24 U1.25 U1.26 U1.27 U1.35 U1.36 U1.37 U1.38 U1.39 U1.40 U1.47 U1.48 U1.50 U1.51 U1.52 U1.53 U1.54 U1.55 U1.56 U1.57 U1.58 U1.59 U2.5 U2.6 U2.7 U3.5 U3.6 U3.7 U7.5 U7.6 U7.7 USBC1.A2 USBC1.A3 USBC1.A4 USBC1.A5 USBC1.A8 USBC1.A9 USBC1.A10 USBC1.A11 USBC1.B2 USBC1.B3 USBC1.B4 USBC1.B5 USBC1.B8 USBC1.B9 USBC1.B10 USBC1.B11
copper on no net:
  other v1: 2345.71,2569.29 4865.45,2569.29 2292.56,2590.94 2398.86,2590.94 4812.3,2590.94 4918.6,2590.94 2270.91,2644.09 2420.52,2644.09 4790.65,2644.09 4940.25,2644.09 2292.56,2697.24 2398.86,2697.24 4812.3,2697.24 4918.6,2697.24 2345.71,2718.89 4865.45,2718.9 2345.71,4695.32 4865.45,4695.33 2292.56,4716.98 2398.86,4716.98 4812.3,4716.98 4918.6,4716.98 2270.91,4770.13 2420.51,4770.13 4790.64,4770.13 4940.25,4770.13 2292.56,4823.28 2398.86,4823.28 4812.3,4823.28 4918.6,4823.28 2345.71,4844.93 4865.45,4844.93

## Keep-outs
Keep-Out Layer:
  lines w10: 2227.63,2644.12 ccw(c2345.74,2644.12) 2345.74,2526.01 ; 2227.63,4770.1 cw(c2345.74,4770.1) 2345.74,4888.21 ; 4865.42,2526.01 ccw(c4865.42,2644.12) 4983.53,2644.12 ; 4865.42,4888.21 cw(c4865.42,4770.1) 4983.53,4770.1

## Other copper
Top Layer:
  region net VCC: 3192.2,4553.56 3192.2,4455.14 3349.68,4455.14 3349.68,4553.56
  region net GND: 3192.2,4632.31 3192.2,4730.73 3349.68,4730.73 3349.68,4632.31
  region net VCC: 2995.35,4553.56 2995.35,4455.14 3152.83,4455.14 3152.83,4553.56
  region net GND: 2995.35,4632.31 2995.35,4730.73 3152.83,4730.73 3152.83,4632.31
  region net GND: 2680.39,3470.89 2581.96,3470.89 2581.96,3313.41 2680.39,3313.41
  region net VCC: 2759.13,3470.89 2857.55,3470.89 2857.55,3313.41 2759.13,3313.41
  region net GND: 2680.39,3903.96 2581.96,3903.96 2581.96,4061.44 2680.39,4061.44
  region net VCC: 2759.13,4061.44 2857.55,4061.44 2857.55,3903.96 2759.13,3903.96
  region net VCC: 2798.5,4553.56 2798.5,4455.14 2955.98,4455.14 2955.98,4553.56
  region net GND: 2798.5,4632.31 2798.5,4730.73 2955.98,4730.73 2955.98,4632.31
  region net JBCBLUE: 2227.63,4376.4 2424.48,4376.4 2424.48,4415.77 2463.85,4455.14 2700.07,4455.14 2739.44,4415.77 2739.44,4140.18 2700.07,4100.81 2463.85,4100.81 2424.48,4140.18 2424.48,4218.92 2227.63,4218.92
  region net JBC1BLUE: 2227.63,3785.85 2424.48,3785.85 2424.48,3825.22 2463.85,3864.59 2700.07,3864.59 2739.44,3825.22 2739.44,3549.63 2700.07,3510.26 2463.85,3510.26 2424.48,3549.63 2424.48,3628.37 2227.63,3628.37
  region net JBCUBLUE: 2227.63,3195.3 2424.48,3195.3 2424.48,3234.67 2463.85,3274.04 2700.07,3274.04 2739.44,3234.67 2739.44,2959.08 2700.07,2919.71 2463.85,2919.71 2424.48,2959.08 2424.48,3037.82 2227.63,3037.82
  region net VCC: 2975.66,4455.14 2778.81,4455.14 2778.81,4297.66 2975.66,4297.66 2975.66,4356.71 2975.66,4356.72
  region net VCC: 2975.66,3864.59 2778.81,3864.59 2778.81,3707.11 2975.66,3707.11 2975.66,3766.16
  region net VCC: 2975.66,3274.04 2778.81,3274.04 2778.81,3116.56 2975.66,3116.56 2975.66,3175.61
  region net VCC: 4107.55,4405.93 4117.4,4396.09 4117.4,4159.86 4107.55,4150.02 4058.34,4150.02 4048.5,4159.86 4048.5,4287.82 4038.66,4297.66 3999.29,4297.66 3979.6,4317.35 3979.6,4396.08 3940.23,4435.45 3704.01,4435.45 3684.32,4455.14 3684.32,4789.79 3704.01,4809.47 3822.12,4809.47 3841.8,4789.79 3841.8,4504.35 3851.65,4494.51 3979.6,4494.51 3989.44,4484.67 3989.44,4425.61 4018.97,4396.09 4018.97,4327.19 4028.81,4317.35 4068.18,4317.35 4078.03,4327.19 4078.03,4396.09 4087.87,4405.93 4107.55,4405.93
  region net U5_1: 4156.77,4720.89 4146.92,4711.05 4146.92,4642.15 4127.24,4622.46 4127.24,4563.41 4146.92,4543.72 4166.61,4543.72 4186.29,4524.04 4186.29,4396.09 4196.14,4386.24 4294.56,4386.24 4304.4,4396.09 4304.4,4553.56 4294.56,4563.41 4235.51,4563.41 4225.66,4573.25 4225.66,4711.05 4215.82,4720.89
  region net D1_1: 4629.21,4277.98 4629.21,4258.29 4619.36,4248.45 4550.47,4248.45 4540.62,4258.29 4540.62,4376.4 4530.78,4386.24 4422.51,4386.24 4412.67,4396.09 4412.67,4553.56 4432.36,4573.25 4442.2,4583.09 4442.2,4701.2 4452.04,4711.05 4678.42,4711.05 4688.26,4701.2 4688.26,4514.19 4629.21,4455.14
  region net 3.3V: 4648.89,4356.72 4658.73,4366.56 4707.95,4366.56 4717.79,4356.72 4717.79,4189.39 4796.53,4110.65 4904.8,4110.65 4914.64,4100.81 4914.64,4051.6 4904.8,4041.75 4845.74,4041.75 4835.9,4031.91 4835.9,3913.8 4826.06,3903.96 4767,3903.96 4757.16,3913.8 4757.16,3992.54 4737.48,4012.23 4609.52,4012.23 4599.68,4022.07 4599.68,4110.65 4648.89,4159.86
Bottom Layer:
  region net GND: 2306.37,4218.92 2267,4179.55 2267,4100.81 2306.37,4061.44 2680.39,4061.44 2680.39,4218.92
  region net GND: 2306.37,3628.37 2267,3589 2267,3510.26 2306.37,3470.89 2680.39,3470.89 2680.39,3628.37
  region net GND: 2306.37,3037.82 2267,2998.45 2267,2919.71 2306.37,2880.34 2660.7,2880.34 2680.39,2900.02 2680.39,3037.82
  region net GND: 2503.22,2900.02 2503.22,4199.23 2503.22,4218.92 2503.22,4199.23 2680.39,4218.92 2680.39,2900.02 2660.7,2880.34 2522.91,2880.34 2503.22,2900.02
  region net GND: 2483.54,3037.82 2503.22,3037.82 2503.22,3057.5
  region net GND: 2483.54,3470.89 2503.22,3451.2 2503.22,3470.89
  region net GND: 2483.54,3628.37 2503.22,3628.37 2503.22,3648.05
  region net GND: 2483.54,4061.44 2503.22,4061.44 2503.22,4041.75
  region net GND: 2503.22,4829.15 2522.91,4809.47 2503.22,4809.47 2503.22,4218.92 2680.39,4218.92 2680.39,4612.62 2700.07,4632.3 3487.47,4632.3 3546.53,4671.67 3546.53,4789.78 3487.47,4829.15 3448.1,4829.15 2522.91,4829.15 2522.91,4809.47 2503.22,4829.15 2522.91,4809.47
  region net GND: 2503.22,4809.47 2522.91,4829.16 2522.91,4809.47
  region net GND: 2483.54,4218.92 2503.22,4238.6 2503.22,4218.92
  region net VCC: 2759.13,2900.02 2778.81,2880.34 2975.66,2880.34 2995.35,2900.02 2995.35,4337.03 3015.03,4356.71 3841.8,4356.71 3861.49,4376.4 3861.49,4770.1 3822.12,4809.47 3704.01,4809.47 3664.64,4770.1 3664.64,4573.25 3644.95,4553.56 2778.81,4553.56 2759.13,4533.88 2759.13,3195.3

## Silkscreen, mask and mechanical layers (free items; w line width, h text height)
Top Overlay:
  circle w10: c2345.71,4770.13 r108.27
  circle w10: c2345.71,2644.09 r108.27
  circle w10: c4865.45,2644.09 r108.27
  circle w10: c4865.45,4770.13 r108.27
Bottom Overlay:
  circle w10: c2345.72,4770.12 r108.27
  circle w10: c2345.72,2644.1 r108.27
  circle w10: c4865.44,2644.1 r108.27
  circle w10: c4865.44,4770.12 r108.27
  text "RST" at 4656.77,3815.17 h45
Top Solder:
  text "overly complex" at 4589.84,4576.93 h32
  text "step down system" at 4540.62,4517.88 h32
  text "(not NNNI's idea)" at 4570.15,4458.82 h32
  text "overly simple" at 3664.64,4340.71 h32
  text "temp sensor" at 3664.08,4281.67 h32 r358
  text "(not Skay's idea)" at 3644.95,4222.6 h32
Bottom Solder:
  region: 2306.37,3037.82 2267,2998.45 2267,2919.71 2306.37,2880.34 2660.7,2880.34 2680.39,2900.02 2680.39,3037.82
  region: 2483.54,3037.82 2503.22,3037.82 2503.22,3057.5
  region: 2503.22,2900.02 2503.22,4199.23 2503.22,4218.92 2503.22,4199.23 2680.39,4218.92 2680.39,2900.02 2660.7,2880.34 2522.91,2880.34 2503.22,2900.02
  region: 2306.37,3628.37 2267,3589 2267,3510.26 2306.37,3470.89 2680.39,3470.89 2680.39,3628.37
  region: 2483.54,3470.89 2503.22,3451.2 2503.22,3470.89
  region: 2483.54,3628.37 2503.22,3628.37 2503.22,3648.05
  region: 2306.37,4218.92 2267,4179.55 2267,4100.81 2306.37,4061.44 2680.39,4061.44 2680.39,4218.92
  region: 2483.54,4061.44 2503.22,4061.44 2503.22,4041.75
  region: 2483.54,4218.92 2503.22,4238.6 2503.22,4218.92
  region: 2503.22,4829.15 2522.91,4809.47 2503.22,4809.47 2503.22,4218.92 2680.39,4218.92 2680.39,4612.62 2700.07,4632.3 3487.47,4632.3 3546.53,4671.67 3546.53,4789.78 3487.47,4829.15 3448.1,4829.15 2522.91,4829.15 2522.91,4809.47 2503.22,4829.15 2522.91,4809.47
  region: 2503.22,4809.47 2522.91,4829.16 2522.91,4809.47
  region: 2759.13,2900.02 2778.81,2880.34 2975.66,2880.34 2995.35,2900.02 2995.35,4337.03 3015.03,4356.71 3841.8,4356.71 3861.49,4376.4 3861.49,4770.1 3822.12,4809.47 3704.01,4809.47 3664.64,4770.1 3664.64,4573.25 3644.95,4553.56 2778.81,4553.56 2759.13,4533.88 2759.13,3195.3
Document:
  lines w0.1: 3292.71,3195.61 3294.71,3197.61